# EAGLE board Simple-Charger-LM317 (EAGLE 7.7.0)
Lithium Ion, Lithium Poly Charge Circuit by Scott Henion Updated 4-02-2003 http://shdesigns.org/lionchg.shtml http://www.instructables.com/id/How-to-make-Lithium-charger/

Size 60.94 x 32.69 mm. Coordinates in mm from the lower left corner, seen from the top.
Outline: 0,0 60.94,0 60.94,32.69 0,32.69 0,0
Copper layers (1*16): Top 0.035mm / dielectric 1.5mm / Bottom 0.035mm
Design rules "default": minimum track width 10mil, minimum drill 24mil, track to track 8mil, track to pad 8mil, pad to pad 8mil, via to via 8mil, smd to smd 8mil, copper to edge 40mil, drill to drill 8mil, minimum pad ring 10mil, minimum via ring 8mil, stop-mask expansion 4mil, vias tented up to drill 0mil, thermal gap 10mil

## Footprints (pad centres in the part's own frame; a part is rotated, then mirrored left to right if it is on the bottom)
SPAD = drill 0.7 pad 1.676 octagon: 1 0,0
E5-4 = drill 0.813 pad 1.905: + -2.54,0 | drill 0.813 pad 1.905 octagon: - 2.54,0
E2,5-4 = drill 0.813 pad 1.6: + 1.27,0 | drill 0.813 pad 1.6 octagon: - -1.27,0
317TL = drill 1.016 long: 1 -2.54,-3.81; 2 0,-3.81; 3 2.54,-3.81 | hole 3.302: 0,11.176
0309/12 = drill 0.813 octagon: 1 -6.35,0; 2 6.35,0
0204/10 = drill 0.813 octagon: 1 -5.08,0; 2 5.08,0
PC16S = drill 1.2 long: 1A -5,0.15; 1E 5,0.15; 1S 0,0.15
TO92-CBE = drill 0.7 pad 1.422: B 0,0; C 0,2.54; E 0,-2.54

## Placement (x,y rotation side)
B+  SPAD  [SPAD]  55.88,19.05 0 top
B-  SPAD  [SPAD]  55.88,13.97 0 top
C1  0.1uF  [E5-4]  27.94,7.62 270 top
C2  0.1uF  [E2,5-4]  10.16,26.67 90 top
IC1  [317TL]  17.78,24.13 180 top
IN+  SPAD  [SPAD]  2.54,27.94 0 top
IN-  SPAD  [SPAD]  2.54,20.32 0 top
R1  1/1W  [0309/12]  44.45,5.08 0 top
R2  2.2k  [0204/10]  33.02,13.97 180 top
R3  470  [0204/10]  43.18,19.05 180 top
R4  1k  [PC16S]  33.02,24.13 180 top
U$1  BC337CBE  [TO92-CBE]  33.02,7.62 0 top

## Library data of the parts
B+ B- IN+ IN- = pad
C1 C2 = c
IC1 = v-reg
R1 = rcl
R2-R4 = r
U$1 = t

## Nets
GND: C1.- C2.- IN-.1 R1.1 U$1.E
N$1: B-.1 R1.2 R2.1 U$1.B
N$2: R2.2 R4.1E
N$3: C1.+ IC1.1 R3.2 R4.1A R4.1S U$1.C
N$4: B+.1 IC1.2 R3.1
N$5: C2.+ IC1.3 IN+.1

## Tracks (layer width: path | path; a pad name or v marks a point on that pad's centre or on a via)
GND  (4 unrouted)
N$1  (3 unrouted)
N$2  (1 unrouted)
N$3  (5 unrouted)
N$4  (2 unrouted)
N$5  (2 unrouted)